# Altium PCB Main ESP32_IoT Gateaway.PcbDoc (part 3 of 4)
Units mm, origin at the board's own origin, x right, y up, seen from the top; angles counter-clockwise.
Board outline 125.73 x 73.66 mm, 4 copper layers (Top Layer, GND, Layer 2, Bottom Layer), stack 0.603 mm thick; 167 components, 121 nets, 681 pads, 324 vias.
Unrouted connection lines stored in the file: 132.
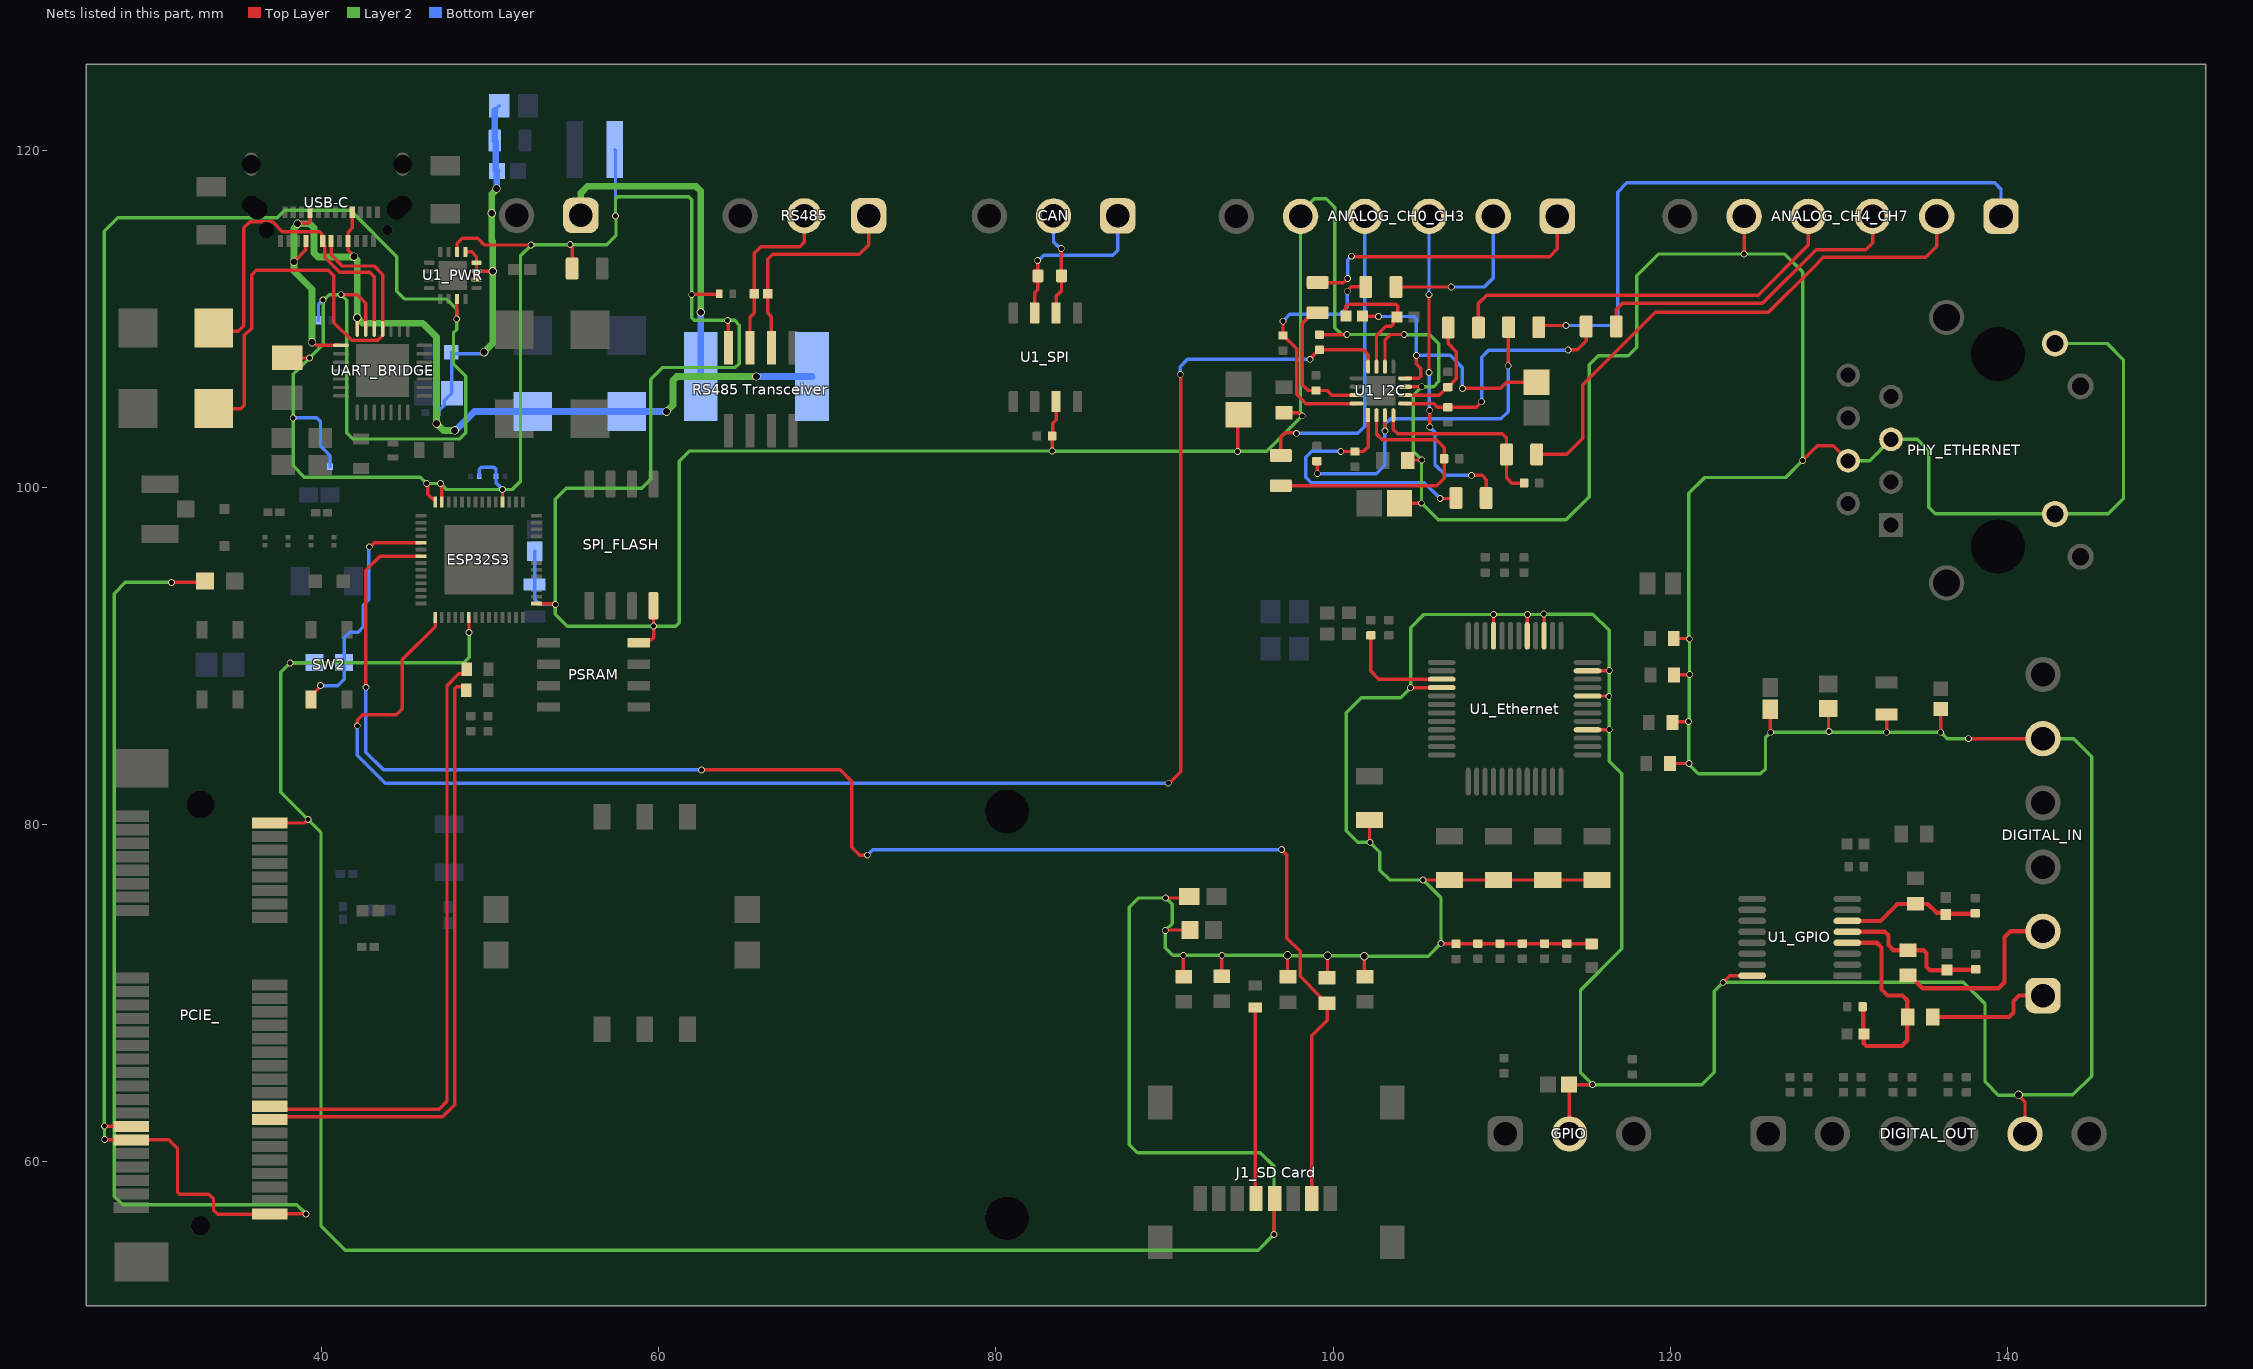
[diagram p4: the nets of this part, all layers, seen from the top]

## Via types
v1: diameter 0.4, hole 0.3, Top Layer to Bottom Layer, 280 vias
v2: diameter 0.5, hole 0.4, Top Layer to Bottom Layer, 18 vias
v3: diameter 0.6, hole 0.3, Top Layer to Bottom Layer, 12 vias
v4: diameter 0.5, hole 0.2, Top Layer to Bottom Layer, 9 vias
v5: diameter 0.5, hole 0.3, Top Layer to Bottom Layer, 5 vias

## Nets (pads, with @x,y where several pads share a name; then routed paths per layer and width w, separated by ;. In a path a pad name is that pad's centre, name@x,y a point inside that pad or via, vN(x,y) a via of type N, cw(c..) or ccw(c..) an arc to the next point about the centre after c; other vN are vias at no path point) (continued)
AIN3_EXT: (continued)
  Top Layer w0.203: R11_I2C.1@96.901,101.89 96.901,102.997 97.155,103.251 97.33,103.251 97.336,103.245 97.796,103.245 v1(97.834,103.207)
  Bottom Layer w0.203: v1(97.834,103.207) 101.455,103.207 101.879,103.632 ANALOG_CH0_CH3.4@101.879,116.078
AIN4_ADC: C8_I2C.1 R12_I2C.2 U1_I2C.3 | length 21
  Top Layer w0.203: C8_I2C.1@99.035,101.556 99.047,101.544 99.047,100.825 v1(99.06,100.813) ; v1(103.073,103.353) 103.076,103.356 U1_I2C.3@103.076,104.278 ; v1(110.388,107.213) 110.401,107.226 110.401,109.487 R12_I2C.2@110.413,109.499
  Bottom Layer w0.203: v1@99.074,100.799 102.551,100.799 103.073,101.321 v1(103.073,103.353) 103.073,103.734 103.403,104.064 109.957,104.064 110.388,104.496 v1(110.388,107.213)
AIN4_EXT: ANALOG_CH4_CH7.1 R12_I2C.1 | length 37.1
  Top Layer w0.203: R12_I2C.1@112.203,109.499 112.304,109.601 v1(113.817,109.601)
  Bottom Layer w0.203: v1(113.817,109.601) 116.434,109.601 116.879,110.046 116.879,117.514 117.424,118.059 139.243,118.059 139.624,117.678 ANALOG_CH4_CH7.1@139.624,116.078
AIN5_ADC: C9_I2C.1 R13_I2C.2 U1_I2C.4 | length 11.3
  Top Layer w0.203: U1_I2C.4@103.576,104.278 103.576,103.434 103.835,103.175 110.043,103.175 110.286,102.932 R13_I2C.2@110.286,101.956 110.286,100.56 110.592,100.254 C9_I2C.1@111.335,100.254
AIN5_EXT: ANALOG_CH4_CH7.2 R13_I2C.1 | length 32.5
  Top Layer w0.203: R13_I2C.1@112.076,101.956 113.859,101.956 114.808,102.905 114.808,106.078 119.118,110.388 125.832,110.388 128.473,113.03 129.083,113.64 135.153,113.64 135.814,114.3 ANALOG_CH4_CH7.2@135.814,116.078
AIN6_ADC: C10_I2C.1 R14_I2C.2 U1_I2C.5 | length 14.9
  Top Layer w0.203: U1_I2C.5@104.267,104.969 105.518,104.969 105.523,104.973 105.966,104.973 106.19,104.75 108.483,104.75 v1(108.814,105.08) ; v1(113.944,108.153) 114.478,108.153 115.01,108.686 R14_I2C.2@115.01,109.55
  Bottom Layer w0.203: v1(108.814,105.08) 108.814,107.721 109.22,108.128 113.919,108.128 v1(113.944,108.153)
AIN6_EXT: ANALOG_CH4_CH7.3 R14_I2C.1 | length 19.4
  Top Layer w0.203: R14_I2C.1@116.8,109.55 116.8,110.552 117.17,110.922 125.476,110.922 128.651,114.097 131.597,114.097 132.004,114.503 ANALOG_CH4_CH7.3@132.004,116.078
AIN7_ADC: C11_I2C.1 R15_I2C.2 U1_I2C.6 | length 6.7
  Top Layer w0.203: U1_I2C.6@104.267,105.469 106.3,105.469 106.782,105.951 C11_I2C.1@106.807,105.951 106.832,105.951 107.315,106.434 107.315,108.052 106.831,108.535 R15_I2C.2@106.831,109.474
AIN7_EXT: ANALOG_CH4_CH7.4 R15_I2C.1 | length 24.1
  Top Layer w0.203: R15_I2C.1@108.621,109.474 108.621,110.907 109.118,111.404 125.222,111.404 128.194,114.376 ANALOG_CH4_CH7.4@128.194,116.078
B_pin: "RS485 Transceiver.7" R1_RS485.2 RS485.2 | length 10.5
  Top Layer w0.203: 65.405,108.281 65.405,110.084 65.665,110.344 R1_RS485.2@65.665,111.481 65.665,113.9 66.04,114.275 68.351,114.275 68.631,114.554 RS485.2@68.631,116.107
BOOT: ESP32S3.5 R9.2 SW2.1 | length 14.6
  Top Layer w0.203: SW2.1@39.362,87.409 39.362,87.609 39.891,88.139 39.891,88.202 v1(39.929,88.24) ; v1(42.824,96.469) 42.878,96.469 43.116,96.707 ESP32S3.5@45.902,96.707
  Bottom Layer w0.203: v1(39.929,88.24) 40.945,88.24 41.326,88.621 R9.2@41.326,89.611 41.326,91.084 41.656,91.415 42.164,91.415 42.469,91.719 42.469,92.989 42.801,93.321 42.801,96.445 v1(42.824,96.469)
CANH: CAN.1 R2_CAN.2 U1_SPI.7 | length 10.2
  Top Layer w0.203: U1_SPI.7@82.296,110.346 82.296,111.531 82.485,111.72 R2_CAN.2@82.485,112.547 82.479,112.553 82.479,113.456 v1(82.474,113.462)
  Bottom Layer w0.203: v1(82.474,113.462) 82.527,113.462 82.832,113.767 86.919,113.767 87.224,114.071 CAN.1@87.224,116.103
CANL: CAN.2 R2_CAN.1 U1_SPI.6 | length 6.1
  Top Layer w0.203: U1_SPI.6@83.566,110.346 83.566,111.354 83.885,111.673 R2_CAN.1@83.885,112.547 83.878,112.554 83.878,114.161 v1(83.871,114.168)
  Bottom Layer w0.203: CAN.2@83.414,116.103 83.414,114.569 83.557,114.425 83.561,114.425 83.818,114.168 v1(83.871,114.168)
CD/DATA3: "J1_SD Card.2" ESP32S3.7 R4.1 | length 96
  Top Layer w0.203: v1(42.621,88.138) 42.621,95.072 43.456,95.907 ESP32S3.7@45.902,95.907 ; v1(62.535,83.236) 70.764,83.236 71.45,82.55 71.45,78.638 71.907,78.181 v1(72.365,78.181) ; v1(96.952,78.511) 96.952,78.497 97.257,78.192 97.257,73.254 98.044,72.466 98.044,70.993 99.246,69.791 99.246,69.691 99.544,69.393 R4.1@99.644,69.393 99.644,68.377 98.726,67.458 98.726,57.81
  Bottom Layer w0.203: v1(42.621,88.138) 42.621,84.277 43.663,83.236 v1(62.535,83.236) v1@62.574,83.236 ; v1(72.365,78.181) 72.695,78.511 v1(96.952,78.511)
CLK: "J1_SD Card.5" R8.2 | length 11.4
  Top Layer w0.203: R8.2@95.377,69.149 95.377,57.859 95.426,57.81
D_N: PCIE_.36 R3_USB.1 | length 37.1
  Top Layer w0.203: PCIE_.36@36.906,63.286 37.078,63.115 46.974,63.115 47.43,63.571 47.43,88.238 48.136,88.944 48.402,88.944 48.601,89.143 R3_USB.1@48.601,89.205
D_P: PCIE_.38 R2_USB.1 | length 36.8
  Top Layer w0.203: PCIE_.38@36.906,62.486 37.078,62.658 47.164,62.658 47.888,63.382 47.888,88.049 48.007,88.168 48.377,88.168 48.575,87.97 R2_USB.1@48.575,87.96
DATA_N: D3.1 UART_BRIDGE.5 USB-C.A7 | length 20.8
  Top Layer w0.2: D3.1@33.594,109.449 33.771,109.271 35.052,109.271 35.382,109.601 35.382,115.392 35.743,115.753 37.082,115.753 37.668,115.167 39.889,115.167 40.01,115.046 40.01,114.667 USB-C.A7@40.06,114.617 40.06,114.417 40.179,114.298 40.179,113.638 41.066,112.751 42.85,112.751 43.112,112.489 UART_BRIDGE.5@43.112,109.401
DATA_P: D4.1 UART_BRIDGE.4 USB-C.A6 | length 29.1
  Top Layer w0.2: D4.1@33.594,104.673 35.204,104.673 35.408,104.877 35.408,109.017 35.839,109.449 35.839,112.598 36.119,112.878 40.386,112.878 40.716,112.547 40.716,109.779 41.769,108.726 43.318,108.726 43.611,109.019 UART_BRIDGE.4@43.611,109.026 ; USB-C.A6@40.56,114.617 40.56,113.796 41.224,113.132 43.104,113.132 43.612,112.624 UART_BRIDGE.4@43.612,109.026
DECAP: C3_I2C.1 R_ADDR_HIGH.2 U1_I2C.8 | length 16.6
  Top Layer w0.203: R_ADDR_HIGH.2@101.752,110.16 102.667,110.16 v1(102.692,110.134) ; U1_I2C.8@104.267,106.469 105.069,106.469 105.204,106.604 105.204,107.052 104.936,107.32 v1(104.936,107.821) ; v1(107.671,105.867) 109.931,105.867 110.299,106.235 C3_I2C.1@112.065,106.235
  Bottom Layer w0.203: v1(102.692,110.134) 104.814,110.134 104.936,110.012 v1(104.936,107.821) 104.94,107.825 106.958,107.825 107.671,107.112 v1(107.671,105.867)
EXP_DIN1: C2_GPIO.1 R3_GPIO.2 R4_GPIO.1 U1_GPIO.4 | length 17.9
  Top Layer w0.254: U1_GPIO.4@130.511,72.979 132.253,72.979 132.537,72.695 132.537,70.206 132.893,69.85 133.782,69.85 134.058,69.574 134.058,67.179 133.731,66.853 131.637,66.853 131.488,67.002 R4_GPIO.1@131.488,67.564 R4_GPIO.1@131.45,67.602 ; C2_GPIO.1@131.412,69.165 131.535,69.042 C2_GPIO.1@131.56,69.042 ; C2_GPIO.1@131.412,69.19 C2_GPIO.1@131.45,69.152 ; 132.537,70.229 132.537,72.517 ; R3_GPIO.2@134.087,68.58 R3_GPIO.2@134.087,68.68 ; R4_GPIO.1@131.45,67.602 C2_GPIO.1@131.45,69.152 ; R4_GPIO.1@131.45,67.602 C2_GPIO.1@131.45,69.152
EXP_DIN1_EXT: DIGITAL_IN.1 R3_GPIO.1 | length 7.5
  Top Layer w0.254: R3_GPIO.1@135.587,68.58 140.106,68.58 140.36,68.834 140.36,69.52 140.691,69.85 DIGITAL_IN.1@142.113,69.85
EXP_DIN2: C3_GPIO.1 R5_GPIO.2 R6_GPIO.1 U1_GPIO.5 | length 9.5
  Top Layer w0.254: U1_GPIO.5@130.511,73.629 132.746,73.629 132.944,73.431 132.944,72.847 133.248,72.542 134.012,72.542 R5_GPIO.2@134.212,72.542 ; R5_GPIO.2@134.112,72.542 135.026,72.542 135.204,72.365 135.204,71.55 135.398,71.357 R6_GPIO.1@136.423,71.357 136.448,71.382 138.1,71.382 C3_GPIO.1@138.125,71.407
EXP_DIN2_EXT: DIGITAL_IN.2 R5_GPIO.1 | length 11.3
  Top Layer w0.254: R5_GPIO.1@134.112,71.042 134.212,71.042 134.973,70.282 139.471,70.282 139.827,70.637 139.827,73.304 140.183,73.66 DIGITAL_IN.2@142.113,73.66
EXP_DIN3: C4_GPIO.1 R7_GPIO.2 R8_GPIO.1 U1_GPIO.6 | length 8.3
  Top Layer w0.254: U1_GPIO.6@130.511,74.279 132.471,74.279 133.476,75.284 134.517,75.284 R7_GPIO.2@134.543,75.31 134.568,75.285 135.275,75.285 135.79,74.771 136.235,74.771 R8_GPIO.1@136.347,74.659 ; R8_GPIO.1@136.385,74.696 138.062,74.696 C4_GPIO.1@138.1,74.734